# Altium PCB XDS110-TAG connector adapter.PcbDoc
Units mm, origin at the board's own origin, x right, y up, seen from the top; angles counter-clockwise.
Board outline 44 x 25.5 mm, 2 copper layers (Top Layer, Bottom Layer); 8 components, 15 nets, 42 pads, 9 vias.
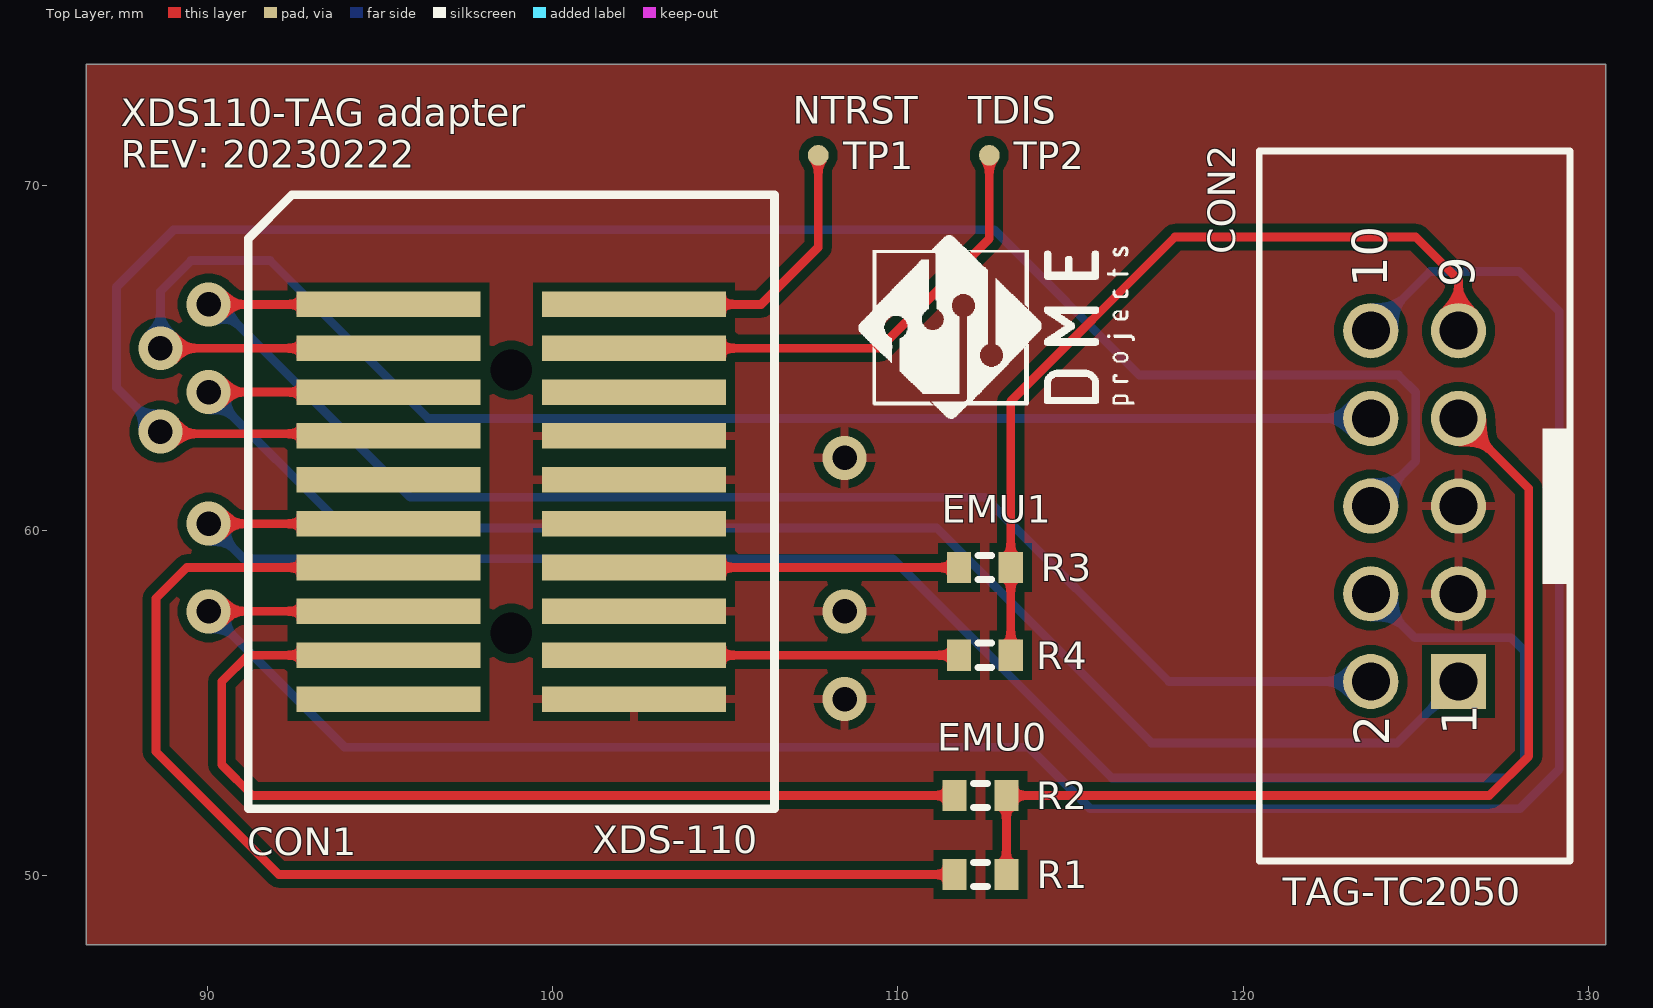
[diagram p0: Top Layer view]
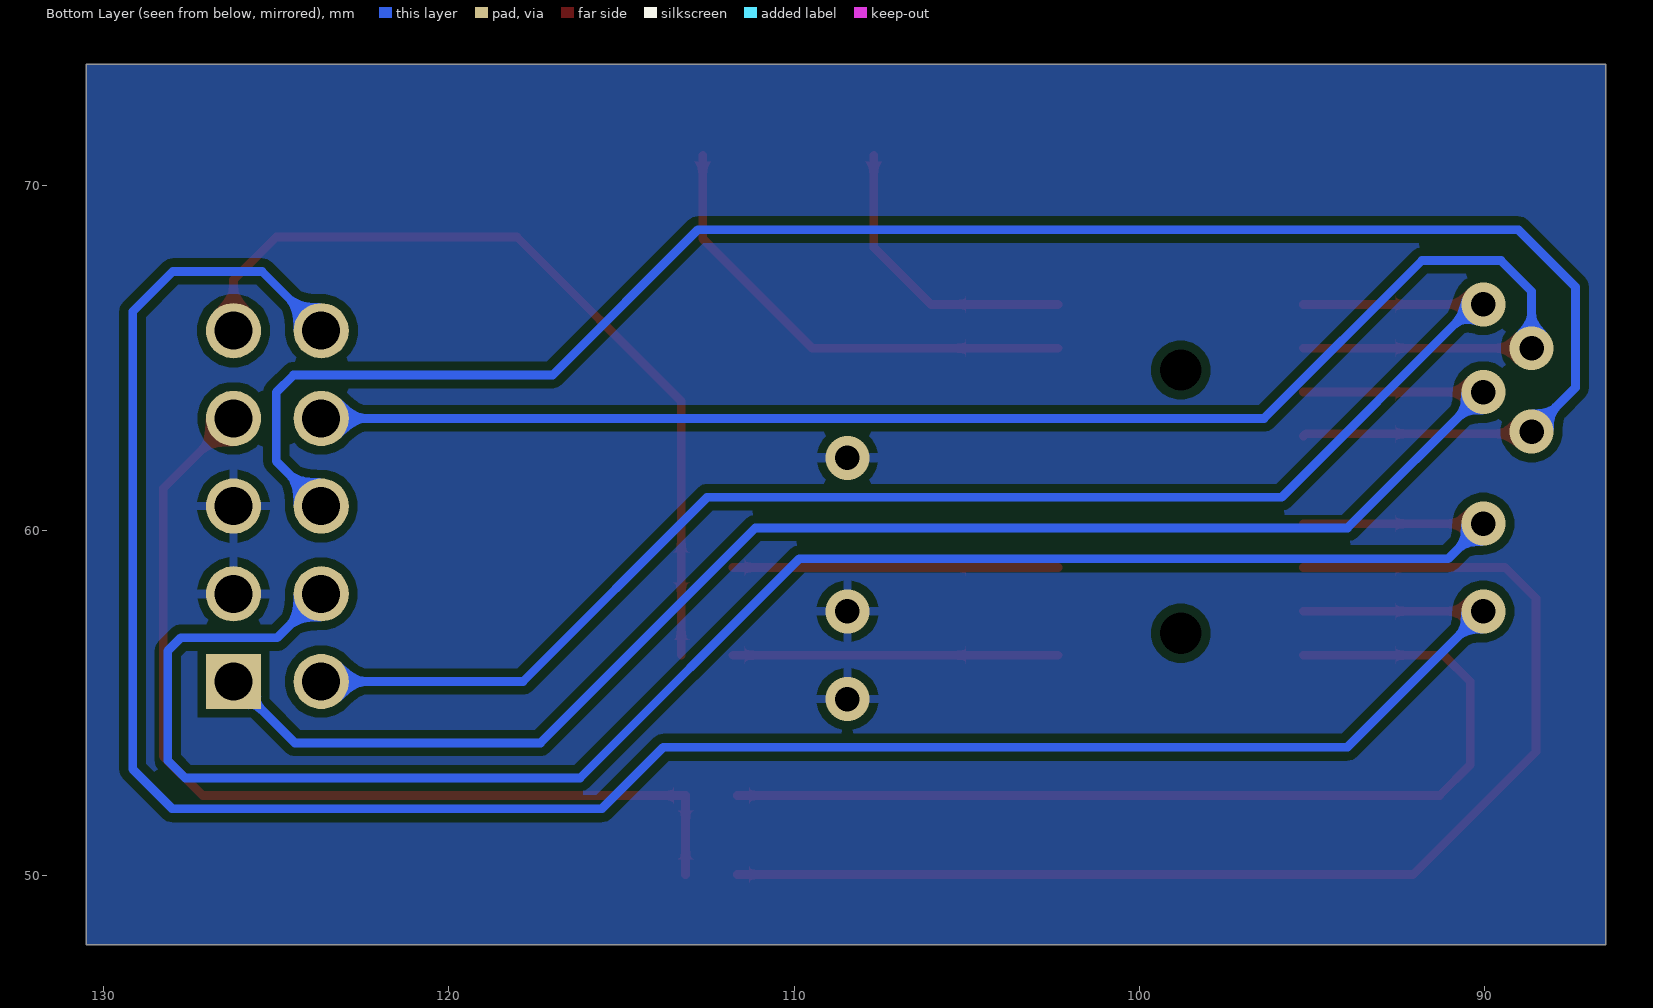
[diagram p1: Bottom Layer view, seen from below]
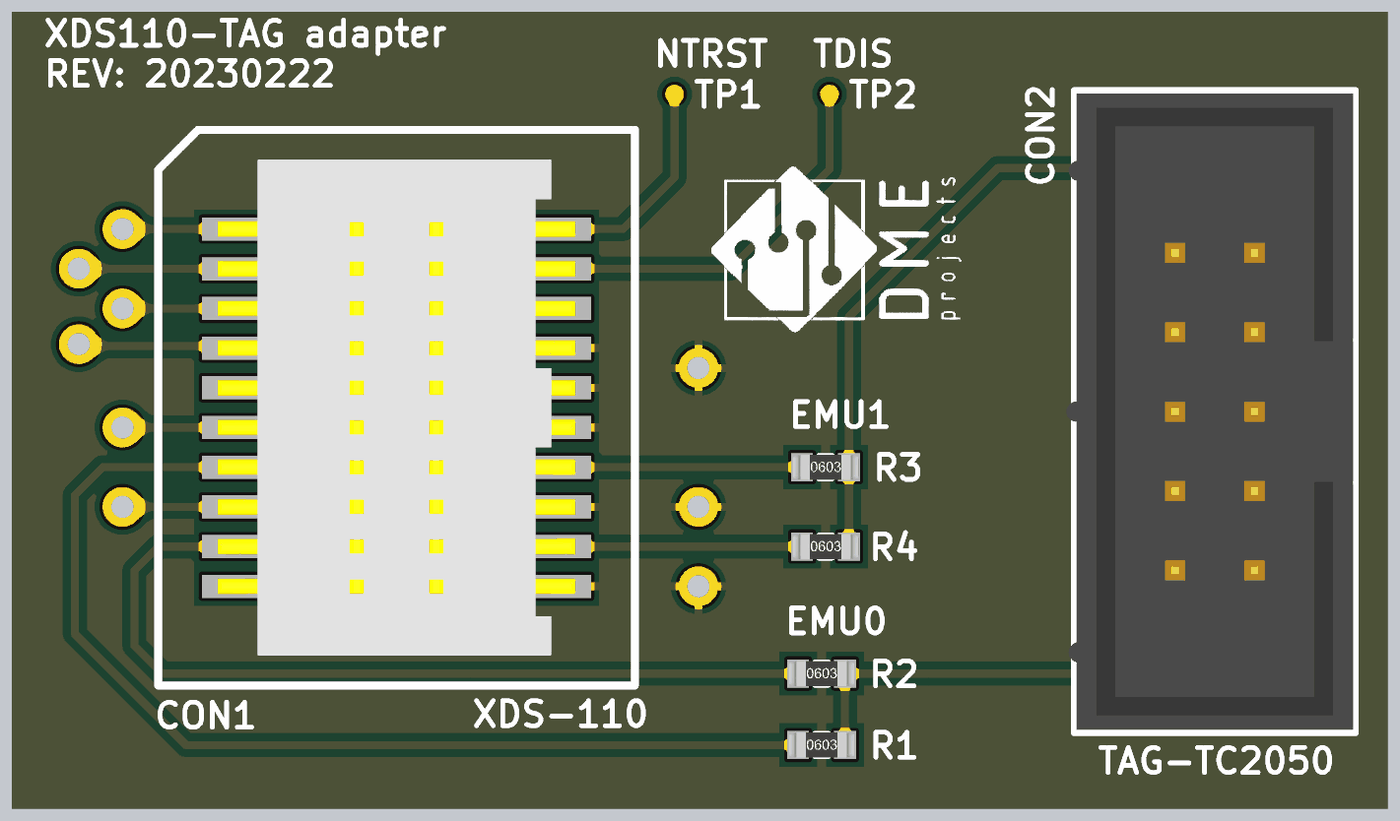
[diagram p2: 3D render of the assembled board from above, using the file's embedded part models]

## Layer stack, top to bottom
Top Solder: solder mask 0.0102, Solder Resist, Dk 3.5
Top Layer: signal copper 0.0356
Dielectric 1: dielectric 0.32, FR-4, Dk 4.8
Bottom Layer: signal copper 0.0356
Bottom Solder: solder mask 0.0102, Solder Resist, Dk 3.5

## Board outline
86.5,48 130.5,48 130.5,73.5 86.5,73.5

## Design rules (kind name [scope] priority, off if disabled: settings)
Clearance [All] p1: gap=0.254 ignorepadtopadclearanceinfootprint=FALSE except(0: Arc-Hole Track-Hole SMDPad-Hole THPad-Hole Via-Hole Fill-Hole Poly-Hole Region-Hole Text-Hole)
PolygonConnect [All] p1: connectstyle=Relief reliefconductorwidth=0.254 reliefentries=4 polygonreliefangle="90 Angle" airgapwidth=0.254
RoomDefinition "XDS110-TAG connector adapter" [InComponentClass('XDS110-TAG connector adapter')] p1: confinementstyle=ConfineIn formatcopy=TRUE lockcomponents=FALSE outline 0,0 180,0 180,97.5 0,97.5
RoutingVias [All] p1: holewidth=0.711 width=1.27 viastyle="Through Hole" minholewidth=0.711 minwidth=1.27 maxholewidth=0.711 maxwidth=1.27
SolderMaskExpansion [All] p1: expansion=0.102 istentingtop=FALSE
Width [All] p1: maxlimit=0.254 minlimit=0.254 preferedwidth=0.254
30 further rules are at their usual default settings.

## Components (designator, comment, footprint, x,y, rotation, side; value= is the part's Value field where it differs from the comment)
CON1 "TML-110-01-G-D-SM" TML-110-01-G-D-SM 98.806,60.833 r270 top
CON2 "61201021621" 61201021621 124.968,60.706 r90 top
R1 "1040" R0603 112.395,50.038 r270 top value=DNP
R2 "1040" R0603 112.395,52.324 r270 top value=0R
R3 "1040" R0603 112.522,58.928 r270 top value=0R
R4 "1040" R0603 112.522,56.388 r270 top value=DNP
TP1 "TPAD6R" TP06R 107.696,70.866 r90 top
TP2 "TPAD6R" TP06R 112.649,70.866 r90 top

## Footprints (in the part's own frame and the unit in brackets; to place one, negate y for a bottom-side part, rotate by r counter-clockwise, add the part's x,y. Pads: shape width x height; smd on the part's side, far side on the other; paste and mask are expansions set on the pad)
61201021621 [mm] "10 pins, straight, gold plating"
  rect 1.6x1.6 hole 1.1: 1(-5.08,-1.27)
  round 1.6 hole 1.1: 2(-5.08,1.27) 3(-2.54,-1.27) 4(-2.54,1.27) 5(0,-1.27) 6(0,1.27) 7(2.54,-1.27) 8(2.54,1.27) 9(5.08,-1.27) 10(5.08,1.27)
  silkscreen extent -10.28,-4.5 10.28,4.5, body extent -10.18,-4.42 10.18,4.75, height 9.13
R0603 [mm]
  rect 0.9x0.7 smd: 1(0,-0.75) 2(0,0.75)
  silkscreen extent -0.35,-0.2 0.35,0.2, body extent -0.4,-1.05 0.4,1.05, height 0.5
TML-110-01-G-D-SM [mm]
  rect 0.74x5.335 smd: 1(-5.715,-3.557) 2(-5.715,3.558) 3(-4.445,-3.557) 4(-4.445,3.558) 5(-3.175,-3.557) 6(-3.175,3.558) 7(-1.905,-3.557) 8(-1.905,3.558) 9(-0.635,-3.557) 10(-0.635,3.558) 11(0.635,-3.557) 12(0.635,3.558) 13(1.905,-3.557) 14(1.905,3.558) 15(3.175,-3.557) 16(3.175,3.558) 17(4.445,-3.557) 18(4.445,3.558) 19(5.715,-3.557) 20(5.715,3.558)
  round 1 hole 1.19 unplated: 21(-3.81,0) 22(3.81,0)
  silkscreen extent -8.89,-7.62 8.89,7.62, body extent -7.94,-5.72 7.94,5.72, height 11.37
TP06R [mm] "Testpoint, round, d=0.6mm"
  round 0.6 smd paste-1: 1(0,0)

## Part data
CON1: library part CMP-002-00076-2, "\".050\"\" X .100\"\" Shrouded Terminal Strip\"", MFG=Samtec, MFG no=TML-110-01-G-D-SM
CON2: library part CMP-002-00077-2, "Male Box Header WR-BHD, THT, Vertical, pitch 2.54 mm, 10 pins", MFG="Wurth Elektronik", MFG no=61201021621
R1 R2 R3 R4: library part CMP-015-001037-1, "generic 0603 Thick film resistor", Power=100mW, Tolerance=0.01, Voltage=75V, MFG=generic, MFG no=generic, Type="Thick film"
TP1 TP2: library part CMP-00028-00002-1, "0.6mm round", Pins=1

## Via types
v1: diameter 1.27, hole 0.711, Top Layer to Bottom Layer, 9 vias

## Nets (pads, with @x,y where several pads share a name; then routed paths per layer and width w, separated by ;. In a path a pad name is that pad's centre, name@x,y a point inside that pad or via, vN(x,y) a via of type N, cw(c..) or ccw(c..) an arc to the next point about the centre after c; other vN are vias at no path point)
EMU0: CON2.7 R1.2 R2.2 | length 28.5
  Top Layer w0.254: R1.2 R2.2 127.127,52.324 128.27,53.467 128.27,61.214 CON2.7
EMU1: CON2.9 R3.2 R4.2 | length 24.3
  Top Layer w0.254: R4.2 R3.2 113.272,63.742 118.03,68.5 125,68.5 126.238,67.262 CON2.9
GND: CON1.8 CON1.10 CON1.12 CON1.16 CON1.20 CON2.3 CON2.5
  other v1: 108.458,55.118 108.458,57.658 108.458,62.103
GPIOIN0: CON1.17 R2.1 | length 29.1
  Top Layer w0.254: CON1.17 91.186,56.388 90.424,55.626 90.424,53.213 91.313,52.324 R2.1
GPIOIN1: CON1.18 R4.1 | length 9.4
  Top Layer w0.254: CON1.18 R4.1
GPIOOUT0: CON1.13 R1.1 | length 36.1
  Top Layer w0.254: CON1.13 89.408,58.928 88.519,58.039 88.519,53.594 92.075,50.038 R1.1
GPIOOUT1: CON1.14 R3.1 | length 9.4
  Top Layer w0.254: CON1.14 R3.1
NRST: CON1.15 CON2.10 | length 67.1
  Top Layer w0.254: v1(90.043,57.658) CON1.15
  Bottom Layer w0.254: v1(90.043,57.658) 93.98,53.721 113.792,53.721 115.57,51.943 128.016,51.943 129.159,53.086 129.159,66.341 128,67.5 125.412,67.5 CON2.10
NTRST: CON1.2 TP1.1 | length 8.7
  Top Layer w0.254: CON1.2 106.045,66.548 107.696,68.199 TP1.1
TCK: CON1.11 CON2.4 | length 54.9
  Top Layer w0.254: v1(90.043,60.198) CON1.11
  Bottom Layer w0.254: v1(90.043,60.198) 91.059,59.182 109.855,59.182 116.205,52.832 127.635,52.832 128.143,53.34 128.143,56.515 127.762,56.896 124.968,56.896 CON2.4
TDI: CON1.3 CON2.8 | length 45.6
  Top Layer w0.254: v1(88.646,65.278) CON1.3
  Bottom Layer w0.254: v1(88.646,65.278) 88.646,66.929 89.535,67.818 91.821,67.818 96.393,63.246 CON2.8
TDIS: CON1.4 TP2.1 | length 14
  Top Layer w0.254: CON1.4 109.474,65.278 112.649,68.453 TP2.1
TDO: CON1.7 CON2.6 | length 55.5
  Top Layer w0.254: v1(88.646,62.865) 88.709,62.801 95.185,62.801 CON1.7
  Bottom Layer w0.254: v1(88.646,62.865) 87.376,64.135 87.376,67.056 89.027,68.707 112.793,68.707 117,64.5 124.5,64.5 125,64 125,62.008 CON2.6
TMS: CON1.1 CON2.2 | length 43.4
  Top Layer w0.254: v1(90.043,66.548) CON1.1
  Bottom Layer w0.254: v1(90.043,66.548) 90.297,66.548 95.885,60.96 112.522,60.96 117.856,55.626 CON2.2
Vref: CON1.5 CON2.1 | length 46.3
  Top Layer w0.254: v1(90.043,64.008) CON1.5
  Bottom Layer w0.254: v1(90.043,64.008) 93.98,60.071 111.125,60.071 117.348,53.848 124.46,53.848 CON2.1
pads on no net: CON1.6 CON1.9 CON1.19 CON1.21 CON1.22

## Polygon pours and split planes (outlines as drawn)
GND on Bottom Layer "GND_BOTTOM" (solid, pour order 1): 86.5,48 130.5,48 130.5,73.5 86.5,73.5
GND on Top Layer "GND_TOP" (solid, remove dead copper, pour order 0): 86.5,48 130.5,48 130.5,73.5 86.5,73.5

## Silkscreen, mask and mechanical layers (free items; w line width, h text height)
Top Overlay:
  drawing of 15 lines, arcs and shapes, not listed
  text "NTRST" at 106.957,71.778 h0.8
  text "TDIS" at 112.037,71.778 h0.8
  text "XDS110-TAG adapter / REV: 20230222" at 87.5,70.5 h0.8
  text "EMU1" at 111.275,60.221 h0.8
  text "EMU0" at 111.148,53.617 h0.8
  text "XDS-110" at 101.15,50.65 h0.8
  text "TAG-TC2050" at 121.15,49.15 h0.8
Board Outline:
  the board outline again, w0.254

## Text inside footprints (layer, text, board x,y; h text height)
CON2: Top Overlay "9" at 126.708,67.046 h1.02 r90; Top Overlay "10" at 124.168,67.046 h1.02 r90; Top Overlay "2" at 124.228,53.766 h1.02 r90; Top Overlay "1" at 126.768,54.066 h1.02 r90